# Altium PCB Macropad.PcbDoc
Units mm, origin at the board's own origin, x right, y up, seen from the top; angles counter-clockwise.
Board outline 206.41 x 70.15 mm, 2 copper layers (Top Layer, Bottom Layer); 20 components, 17 nets, 121 pads, 3 vias.
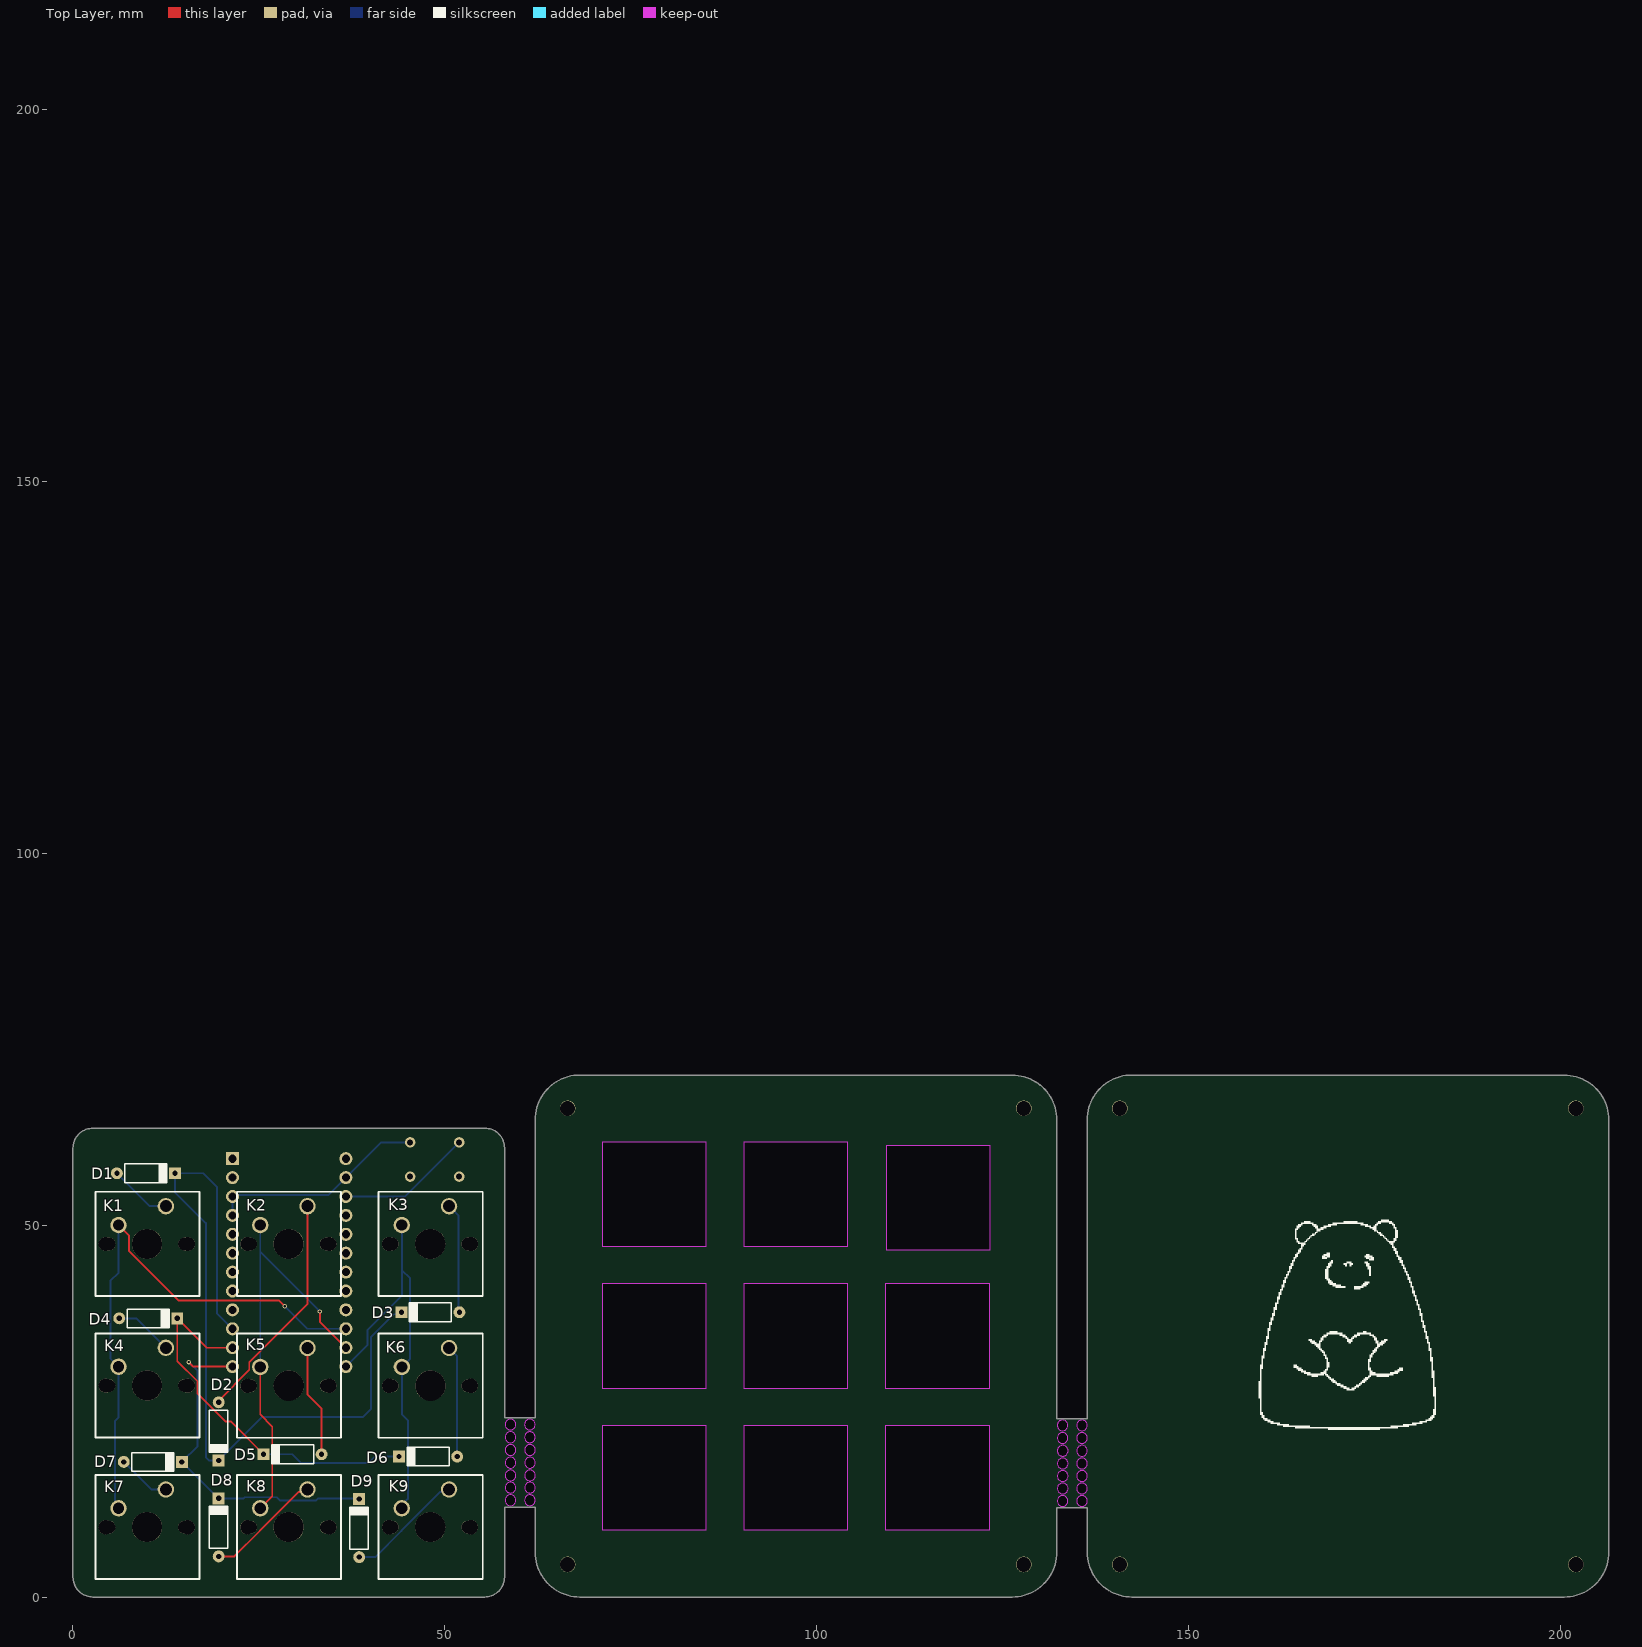
[diagram p0: Top Layer view]
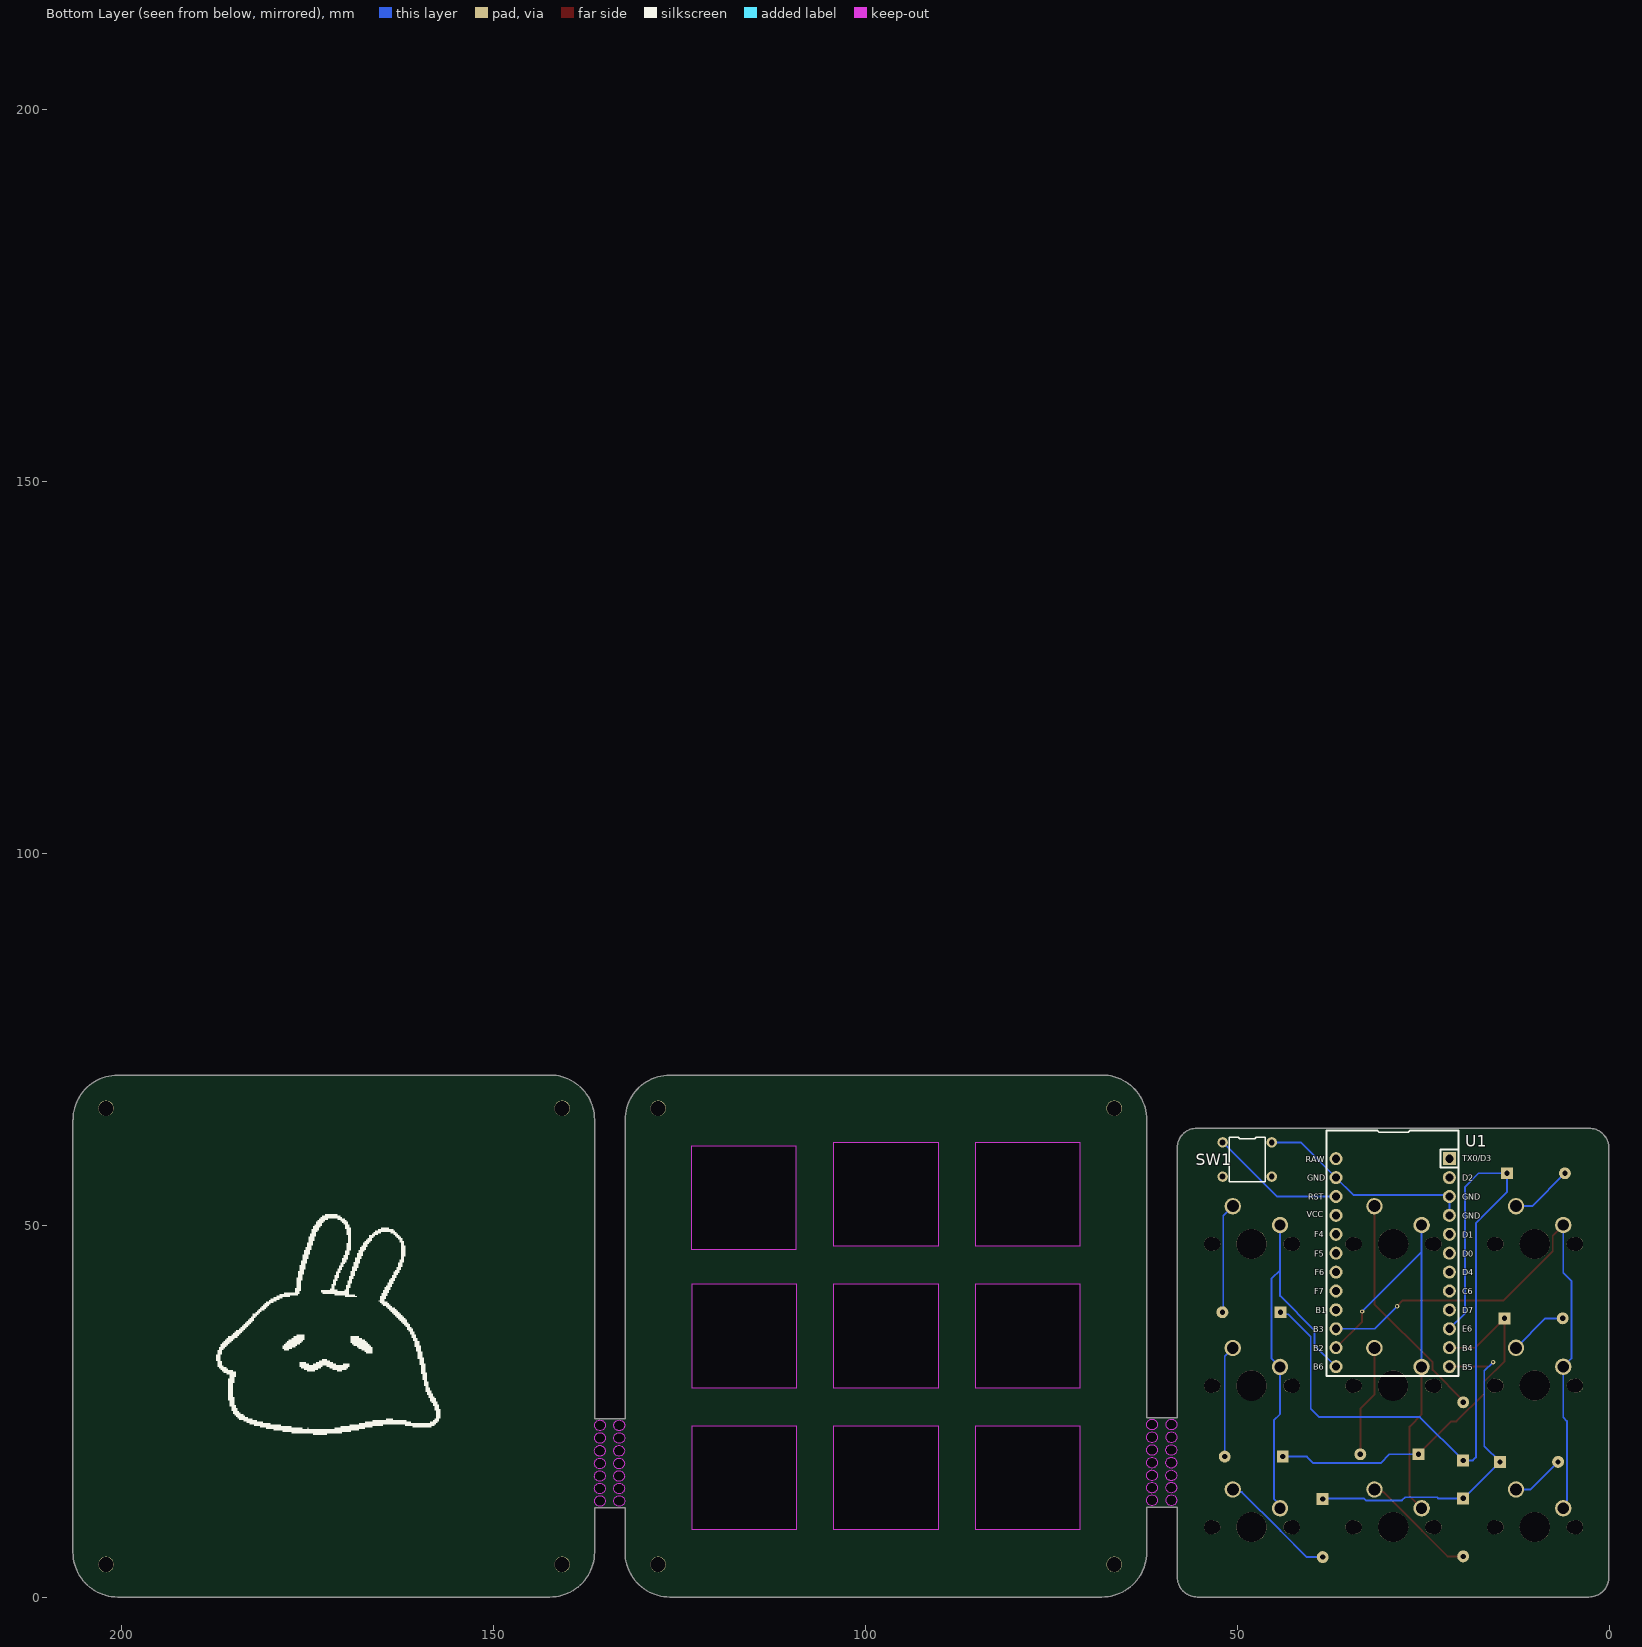
[diagram p1: Bottom Layer view, seen from below]

## Layer stack, top to bottom
Top Solder: solder mask 0.0102, Solder Resist, Dk 3.5
Top Layer: signal copper 0.0356
Dielectric 1: dielectric 0.32, FR-4, Dk 4.8
Bottom Layer: signal copper 0.0356
Bottom Solder: solder mask 0.0102, Solder Resist, Dk 3.5

## Board outline
2.805,0.127 55.453,0.127 ccw(c55.453,2.801) 58.127,2.801 58.153,2.827 58.153,12.176 62.241,12.176 62.241,6.138 62.252,6.127 ccw(c68.252,6.127) 68.252,0.127 126.341,0.127 126.341,0.13 ccw(c126.341,6.13) 132.341,6.13 132.345,6.134 132.345,12.117 136.442,12.117 136.442,6.131 136.446,6.127 ccw(c142.446,6.127) 142.446,0.127 200.535,0.127 200.535,0.13 ccw(c200.535,6.13) 206.535,6.13 206.532,6.13 206.532,64.267 206.522,64.267 ccw(c200.522,64.267) 200.522,70.267 142.437,70.276 142.437,70.28 ccw(c142.437,64.28) 136.437,64.28 136.442,64.28 136.442,24.1 132.338,24.1 132.338,64.267 132.328,64.267 ccw(c126.328,64.267) 126.328,70.267 68.243,70.276 68.243,70.28 ccw(c68.243,64.28) 62.243,64.28 62.248,64.28 62.248,24.239 58.131,24.239 58.131,60.512 58.127,60.512 ccw(c55.512,60.512) 55.512,63.127 2.801,63.127 ccw(c2.801,60.453) 0.127,60.453 0.127,2.805 ccw(c2.805,2.805)
cut-out: 58.2,23.3 ccw(c58.921,23.3) 58.921,22.579 ccw(c58.921,23.3) 59.642,23.3 ccw(c58.921,23.3) 58.921,24.021 ccw(c58.921,23.3)
cut-out: 60.8,23.3 ccw(c61.521,23.3) 61.521,22.579 ccw(c61.521,23.3) 62.242,23.3 ccw(c61.521,23.3) 61.521,24.021 ccw(c61.521,23.3)
cut-out: 58.2,21.6 ccw(c58.921,21.6) 58.921,20.879 ccw(c58.921,21.6) 59.642,21.6 ccw(c58.921,21.6) 58.921,22.321 ccw(c58.921,21.6)
cut-out: 60.8,21.6 ccw(c61.521,21.6) 61.521,20.879 ccw(c61.521,21.6) 62.242,21.6 ccw(c61.521,21.6) 61.521,22.321 ccw(c61.521,21.6)
cut-out: 58.214,19.879 ccw(c58.936,19.879) 58.936,19.158 ccw(c58.936,19.879) 59.657,19.879 ccw(c58.936,19.879) 58.936,20.6 ccw(c58.936,19.879)
cut-out: 60.814,19.879 ccw(c61.536,19.879) 61.536,19.158 ccw(c61.536,19.879) 62.257,19.879 ccw(c61.536,19.879) 61.536,20.6 ccw(c61.536,19.879)
cut-out: 58.214,18.179 ccw(c58.936,18.179) 58.936,17.458 ccw(c58.936,18.179) 59.657,18.179 ccw(c58.936,18.179) 58.936,18.9 ccw(c58.936,18.179)
cut-out: 60.814,18.179 ccw(c61.536,18.179) 61.536,17.458 ccw(c61.536,18.179) 62.257,18.179 ccw(c61.536,18.179) 61.536,18.9 ccw(c61.536,18.179)
cut-out: 58.214,16.479 ccw(c58.936,16.479) 58.936,15.758 ccw(c58.936,16.479) 59.657,16.479 ccw(c58.936,16.479) 58.936,17.2 ccw(c58.936,16.479)
cut-out: 60.814,16.479 ccw(c61.536,16.479) 61.536,15.758 ccw(c61.536,16.479) 62.257,16.479 ccw(c61.536,16.479) 61.536,17.2 ccw(c61.536,16.479)
cut-out: 58.213,14.824 ccw(c58.934,14.824) 58.934,14.103 ccw(c58.934,14.824) 59.655,14.824 ccw(c58.934,14.824) 58.934,15.545 ccw(c58.934,14.824)
cut-out: 60.813,14.824 ccw(c61.534,14.824) 61.534,14.103 ccw(c61.534,14.824) 62.255,14.824 ccw(c61.534,14.824) 61.534,15.545 ccw(c61.534,14.824)
cut-out: 58.203,13.134 ccw(c58.924,13.134) 58.924,12.413 ccw(c58.924,13.134) 59.645,13.134 ccw(c58.924,13.134) 58.924,13.855 ccw(c58.924,13.134)
cut-out: 60.803,13.134 ccw(c61.524,13.134) 61.524,12.413 ccw(c61.524,13.134) 62.245,13.134 ccw(c61.524,13.134) 61.524,13.855 ccw(c61.524,13.134)
cut-out: 132.4,23.2 ccw(c133.121,23.2) 133.121,22.479 ccw(c133.121,23.2) 133.842,23.2 ccw(c133.121,23.2) 133.121,23.921 ccw(c133.121,23.2)
cut-out: 132.4,21.5 ccw(c133.121,21.5) 133.121,20.779 ccw(c133.121,21.5) 133.842,21.5 ccw(c133.121,21.5) 133.121,22.221 ccw(c133.121,21.5)
cut-out: 132.414,19.779 ccw(c133.136,19.779) 133.136,19.058 ccw(c133.136,19.779) 133.857,19.779 ccw(c133.136,19.779) 133.136,20.5 ccw(c133.136,19.779)
cut-out: 132.414,18.079 ccw(c133.136,18.079) 133.136,17.358 ccw(c133.136,18.079) 133.857,18.079 ccw(c133.136,18.079) 133.136,18.8 ccw(c133.136,18.079)
cut-out: 132.414,16.379 ccw(c133.136,16.379) 133.136,15.658 ccw(c133.136,16.379) 133.857,16.379 ccw(c133.136,16.379) 133.136,17.1 ccw(c133.136,16.379)
cut-out: 132.413,14.724 ccw(c133.134,14.724) 133.134,14.003 ccw(c133.134,14.724) 133.855,14.724 ccw(c133.134,14.724) 133.134,15.445 ccw(c133.134,14.724)
cut-out: 132.403,13.034 ccw(c133.124,13.034) 133.124,12.313 ccw(c133.124,13.034) 133.845,13.034 ccw(c133.124,13.034) 133.124,13.755 ccw(c133.124,13.034)
cut-out: 135.003,13.034 ccw(c135.724,13.034) 135.724,12.313 ccw(c135.724,13.034) 136.445,13.034 ccw(c135.724,13.034) 135.724,13.755 ccw(c135.724,13.034)
cut-out: 135.013,14.724 ccw(c135.734,14.724) 135.734,14.003 ccw(c135.734,14.724) 136.455,14.724 ccw(c135.734,14.724) 135.734,15.445 ccw(c135.734,14.724)
cut-out: 135.014,16.379 ccw(c135.736,16.379) 135.736,15.658 ccw(c135.736,16.379) 136.457,16.379 ccw(c135.736,16.379) 135.736,17.1 ccw(c135.736,16.379)
cut-out: 135.014,18.079 ccw(c135.736,18.079) 135.736,17.358 ccw(c135.736,18.079) 136.457,18.079 ccw(c135.736,18.079) 135.736,18.8 ccw(c135.736,18.079)
cut-out: 135.014,19.779 ccw(c135.736,19.779) 135.736,19.058 ccw(c135.736,19.779) 136.457,19.779 ccw(c135.736,19.779) 135.736,20.5 ccw(c135.736,19.779)
cut-out: 135,21.5 ccw(c135.721,21.5) 135.721,20.779 ccw(c135.721,21.5) 136.442,21.5 ccw(c135.721,21.5) 135.721,22.221 ccw(c135.721,21.5)
cut-out: 135,23.2 ccw(c135.721,23.2) 135.721,22.479 ccw(c135.721,23.2) 136.442,23.2 ccw(c135.721,23.2) 135.721,23.921 ccw(c135.721,23.2)
cut-out: 71.244,9.176 85.244,9.176 85.244,23.176 71.244,23.176
cut-out: 71.244,47.236 85.244,47.236 85.244,61.236 71.244,61.236
cut-out: 109.304,9.176 123.304,9.176 123.304,23.176 109.304,23.176
cut-out: 109.4,46.8 123.4,46.8 123.4,60.8 109.4,60.8
cut-out: 71.244,28.206 85.244,28.206 85.244,42.206 71.244,42.206
cut-out: 109.304,28.206 123.304,28.206 123.304,42.206 109.304,42.206
cut-out: 90.274,9.176 104.274,9.176 104.274,23.176 90.274,23.176
cut-out: 90.274,47.236 104.274,47.236 104.274,61.236 90.274,61.236
cut-out: 90.274,28.206 104.274,28.206 104.274,42.206 90.274,42.206

## Design rules (kind name [scope] priority, off if disabled: settings)
Clearance [All] p1: gap=0.254 ignorepadtopadclearanceinfootprint=FALSE except(0: Arc-Hole Track-Hole SMDPad-Hole THPad-Hole Via-Hole Fill-Hole Poly-Hole Region-Hole Text-Hole)
PolygonConnect [All] p1: connectstyle=Relief reliefconductorwidth=0.254 reliefentries=4 polygonreliefangle="90 Angle" airgapwidth=0.254
RoutingVias [All] p1: holewidth=0.711 width=1.27 viastyle="Through Hole" minholewidth=0.711 minwidth=1.27 maxholewidth=0.711 maxwidth=1.27
SolderMaskExpansion [All] p1: expansion=0.102 istentingtop=FALSE
Width [All] p1: maxlimit=0.254 minlimit=0.254 preferedwidth=0.254
30 further rules are at their usual default settings.

## Components (designator, comment, footprint, x,y, rotation, side; value= is the part's Value field where it differs from the comment)
D1 "D" DIODE 13.833,57.074 r180 top
D2 "D" DIODE 19.71,18.494 r90 top
D3 "D" DIODE 44.264,38.396 r0 top
D4 "D" DIODE 14.14,37.58 r180 top
D5 "D" DIODE 25.732,19.311 r0 top
D6 "D" DIODE 43.958,19.004 r0 top
D7 "D" DIODE 14.752,18.29 r180 top
D8 "D" DIODE 19.71,13.391 r270 top
D9 "D" DIODE 38.592,13.289 r270 top
K1 "KEYSW-canadian_parts" SOCKET 3.085,40.585 r0 top
K2 "KEYSW-canadian_parts" SOCKET 22.115,40.585 r0 top
K3 "KEYSW-canadian_parts" SOCKET 41.145,40.585 r0 top
K4 "KEYSW-canadian_parts" SOCKET 3.085,21.555 r0 top
K5 "KEYSW-canadian_parts" SOCKET 22.121,21.529 r0 top
K6 "KEYSW-canadian_parts" SOCKET 41.151,21.529 r0 top
K7 "KEYSW-canadian_parts" SOCKET 3.085,2.525 r0 top
K8 "KEYSW-canadian_parts" SOCKET 22.115,2.525 r0 top
K9 "KEYSW-canadian_parts" SOCKET 41.145,2.525 r0 top
SW1 "SW_Push" RESET 50.534,55.524 r90 bottom
U1 "ProMicro-keebio" PRO-MICRO 36.801,59.034 r180 bottom

## Footprints (in the part's own frame and the unit in brackets; to place one, negate y for a bottom-side part, rotate by r counter-clockwise, add the part's x,y. Pads: shape width x height; smd on the part's side, far side on the other; paste and mask are expansions set on the pad)
DIODE [mm]
  rect 1.6x1.6 hole 0.7: 1(0,0)
  round 1.6 hole 0.7: 2(7.8,0)
  silkscreen extent 1.07,-1.25 6.73,1.25
PRO-MICRO [mm]
  rect 1.753x1.753 hole 1.092: 1(15.24,0)
  round 1.753 hole 1.092: 2(15.24,-2.54) 3(15.24,-5.08) 4(15.24,-7.62) 5(15.24,-10.16) 6(15.24,-12.7) 7(15.24,-15.24) 8(15.24,-17.78) 9(15.24,-20.32) 10(15.24,-22.86) 11(15.24,-25.4) 12(15.24,-27.94) 13(0,-27.94) 14(0,-25.4) 15(0,-22.86) 16(0,-20.32) 17(0,-17.78) 18(0,-15.24) 19(0,-12.7) 20(0,-10.16) 21(0,-7.62) 22(0,-5.08) 23(0,-2.54) 24(0,0)
  silkscreen extent -1.27,-29.21 16.48,3.81
RESET [mm]
  round 1.4 hole 0.8: 1(5.7,1.5) 2(5.7,-5.1) 3(1.1,1.5) 4(1.1,-5.1)
  silkscreen extent 0.4,-4.2 6.4,0.6
SOCKET [mm]
  round 2.2 hole 1.5: 1(3.175,9.525)
  round 2.2 hole 1.6: 2(9.525,12.065)
  round 1.9 hole 1.9: 3(1.45,6.985) 3(12.46,6.985)
  round 1.7 hole 1.7: 3(1.88,6.985) 3(12.04,6.985)
  round 4.05 hole 4.05: 3(7,7)
  silkscreen extent 0.05,0 14.05,14

## Free pads (board coordinates)
  round 2.1 hole 2: 3(66.6,4.5) 3(66.6,65.8) 3(127.9,4.5) 3(127.9,65.8) 3(127.9,65.8) 3(127.9,65.8) 3(140.795,4.5) 3(140.795,65.8) 3(202.095,4.5) 3(202.095,65.8) 3(202.095,65.8) 3(202.095,65.8)

## Via types
v1: diameter 0.6, hole 0.3, Top Layer to Bottom Layer, 3 vias

## Nets (pads, with @x,y where several pads share a name; then routed paths per layer and width w, separated by ;. In a path a pad name is that pad's centre, name@x,y a point inside that pad or via, vN(x,y) a via of type N, cw(c..) or ccw(c..) an arc to the next point about the centre after c; other vN are vias at no path point)
C0: K1.1 K4.1 K7.1 U1.15 | length 76.9
  Top Layer w0.254: K1.1 7.679,48.691 7.679,46.588 14.271,39.997 27.803,39.997 v1(28.6,39.2)
  Bottom Layer w0.254: K7.1 6.26,12.577 5.771,13.066 5.771,23.778 6.26,24.267 K4.1 5.159,32.181 5.159,42.632 6.26,43.733 K1.1 ; v1(28.6,39.2) 31.626,36.174 U1.15
C1: K2.1 K5.1 K8.1 U1.14 | length 57
  Top Layer w0.254: K8.1 26.913,13.673 26.913,23.042 25.296,24.659 K5.1 ; v1(33.3,38.5) 33.3,37.135 U1.14
  Bottom Layer w0.254: K2.1 25.29,46.51 25.293,46.507 ; K5.1 25.293,31.057 25.293,46.507 ; v1(33.3,38.5) 25.293,46.507
C2: K3.1 K6.1 K9.1 U1.13 | length 55.8
  Bottom Layer w0.254: U1.13 39.692,33.985 39.692,35.963 44.32,40.591 44.32,44.073 ; K9.1 44.32,12.506 45.139,13.325 45.139,23.88 44.326,24.693 K6.1 45.445,32.173 45.445,42.948 44.32,44.073 ; K3.1 44.32,44.073
GND: SW1.2 U1.3 U1.4 U1.23 | length 29.4
  Bottom Layer w0.254: U1.4 U1.3 21.738,54.131 34.438,54.131 U1.23 41.531,61.224 SW1.2
NetD1_2: D1.2 K1.2 | length 8.4
  Bottom Layer w0.254: D1.2 10.457,52.65 K1.2
NetD2_2: D2.2 K2.2 | length 31.3
  Top Layer w0.254: D2.2 19.71,26.535 23.815,30.64 23.815,31.667 31.64,39.492 K2.2
NetD3_2: D3.2 K3.2 | length 14.8
  Bottom Layer w0.254: K3.2 51.954,51.366 51.954,38.506 D3.2
NetD4_2: D4.2 K4.2 | length 7.9
  Bottom Layer w0.254: D4.2 8.65,37.58 K4.2
NetD5_2: D5.2 K5.2 | length 15.1
  Top Layer w0.254: K5.2 31.646,27.314 33.532,25.428 D5.2
NetD6_2: D6.2 K6.2 | length 15
  Bottom Layer w0.254: K6.2 51.758,32.512 D6.2
NetD7_2: D7.2 K7.2 | length 7.2
  Bottom Layer w0.254: D7.2 10.652,14.59 K7.2
NetD8_2: D8.2 K8.2 | length 15.7
  Top Layer w0.254: D8.2 21.817,5.591 25.226,9 25.226,9.039 30.405,14.218 31.268,14.218 K8.2
NetD9_2: D9.2 K9.2 | length 15.9
  Bottom Layer w0.254: D9.2 40.745,5.489 44.256,9 44.256,9.039 49.435,14.218 50.298,14.218 K9.2
NetSW1_1: SW1.1 U1.22 | length 18.2
  Bottom Layer w0.254: U1.22 44.764,53.954 SW1.1
R0: D1.1 D2.1 D3.1 U1.10 | length 106.6
  Bottom Layer w0.254: U1.10 19.463,38.272 19.463,55.263 17.651,57.074 D1.1 13.833,54.534 18,50.367 18,18.9 18.406,18.494 D2.1 25.516,24.3 39.051,24.3 40.2,25.449 40.2,35.1 43.232,38.132 44,38.132 D3.1
R1: D4.1 D5.1 D6.1 U1.11 | length 51.6
  Top Layer w0.254: U1.11 18.086,33.634 D4.1 14.14,31.827 16.876,29.091 16.876,27.458 20.613,23.721 21.322,23.721 D5.1
  Bottom Layer w0.254: D5.1 29.623,19.311 30.804,18.13 39.83,18.13 40.704,19.004 D6.1
R2: D7.1 D8.1 D9.1 U1.12 | length 47.1
  Top Layer w0.254: v1(15.7,31.7) 16.306,31.094 U1.12
  Bottom Layer w0.254: v1(15.7,31.7) 16.876,30.524 16.876,20.414 D7.1 18.978,14.064 19.037,14.064 D8.1 23.073,13.391 23.213,13.531 27.522,13.531 27.944,13.109 32.791,13.109 33.073,13.391 38.49,13.391 D9.1
pads on no net: K1.3 K2.3 K3.3 K4.3 K5.3 K6.3 K7.3 K8.3 K9.3 SW1.3 SW1.4 U1.1 U1.2 U1.5 U1.6 U1.7 U1.8 U1.9 U1.16 U1.17 U1.18 U1.19 U1.20 U1.21 U1.24

## Other copper
Top Layer:
  region: 146.878,207.896

## Silkscreen, mask and mechanical layers (free items; w line width, h text height)
Top Overlay:
  drawing of 13 lines, arcs and shapes, not listed
Bottom Overlay:
  drawing of 4 lines, arcs and shapes, not listed
Mechanical 1:
  lines w0.254: 58.127,2.801 cw(c55.453,2.801) 55.453,0.127 2.805,0.127 cw(c2.805,2.805) 0.127,2.805 0.127,60.453 cw(c2.801,60.453) 2.801,63.127 55.512,63.127 cw(c55.512,60.512) 58.127,60.512 ; 58.131,60.512 58.131,24.239 62.248,24.239 62.248,64.28 ; 58.153,2.827 58.153,12.176 62.241,12.176 62.241,6.138 ; 62.243,64.28 cw(c68.243,64.28) 68.243,70.28 ; 62.252,6.127 ccw(c68.252,6.127) 68.252,0.127 126.341,0.127 ; 68.243,70.276 126.328,70.267 cw(c126.328,64.267) 132.328,64.267 ; 126.341,0.13 ccw(c126.341,6.13) 132.341,6.13 ; 132.338,64.267 132.338,24.1 136.442,24.1 136.442,64.28 ; 132.345,6.134 132.345,12.117 136.442,12.117 136.442,6.131 ; 136.437,64.28 cw(c142.437,64.28) 142.437,70.28 ; 136.446,6.127 ccw(c142.446,6.127) 142.446,0.127 200.535,0.127 ; 142.437,70.276 200.522,70.267 cw(c200.522,64.267) 206.522,64.267 ; 200.535,0.13 ccw(c200.535,6.13) 206.535,6.13 ; 206.532,6.13 206.532,64.267

## Text inside footprints (layer, text, board x,y; h text height)
U1: Bottom Overlay "B5" at 19.851,30.584 h0.8; Bottom Overlay "B4" at 19.851,33.184 h0.8; Bottom Overlay "E6" at 19.851,35.784 h0.8; Bottom Overlay "TX0/D3" at 19.851,58.698 h0.8; Bottom Overlay "D7" at 19.851,38.284 h0.8; Bottom Overlay "C6" at 19.851,40.784 h0.8; Bottom Overlay "D4" at 19.851,43.384 h0.8; Bottom Overlay "D0" at 19.851,45.884 h0.8; Bottom Overlay "D1" at 19.851,48.384 h0.8; Bottom Overlay "GND" at 19.851,50.984 h0.8; Bottom Overlay "D2" at 19.851,56.084 h0.8; Bottom Overlay "B6" at 39.851,30.684 h0.8; Bottom Overlay "B2" at 39.851,33.184 h0.8; Bottom Overlay "B3" at 39.851,35.684 h0.8; Bottom Overlay "B1" at 39.551,38.284 h0.8; Bottom Overlay "F7" at 39.751,40.784 h0.8; Bottom Overlay "F5" at 39.751,45.884 h0.8; Bottom Overlay "F4" at 39.751,48.484 h0.8; Bottom Overlay "VCC" at 40.751,51.184 h0.8; Bottom Overlay "RST" at 40.551,53.484 h0.8; Bottom Overlay "GND" at 40.651,56.084 h0.8; Bottom Overlay "RAW" at 40.851,58.584 h0.8; Bottom Overlay "GND" at 19.851,53.484 h0.8; Bottom Overlay "F6" at 39.651,43.384 h0.8